# Altium PCB UltraZohm_Analog_BreakoutBoard.PcbDoc
Units mil, origin at the board's own origin, x right, y up, seen from the top; angles counter-clockwise.
Board outline 1968.5 x 3149.61 mil, 2 copper layers (Top Layer, Bottom Layer), stack 12.8 mil thick; 11 components, 51 nets, 203 pads, 14 vias.
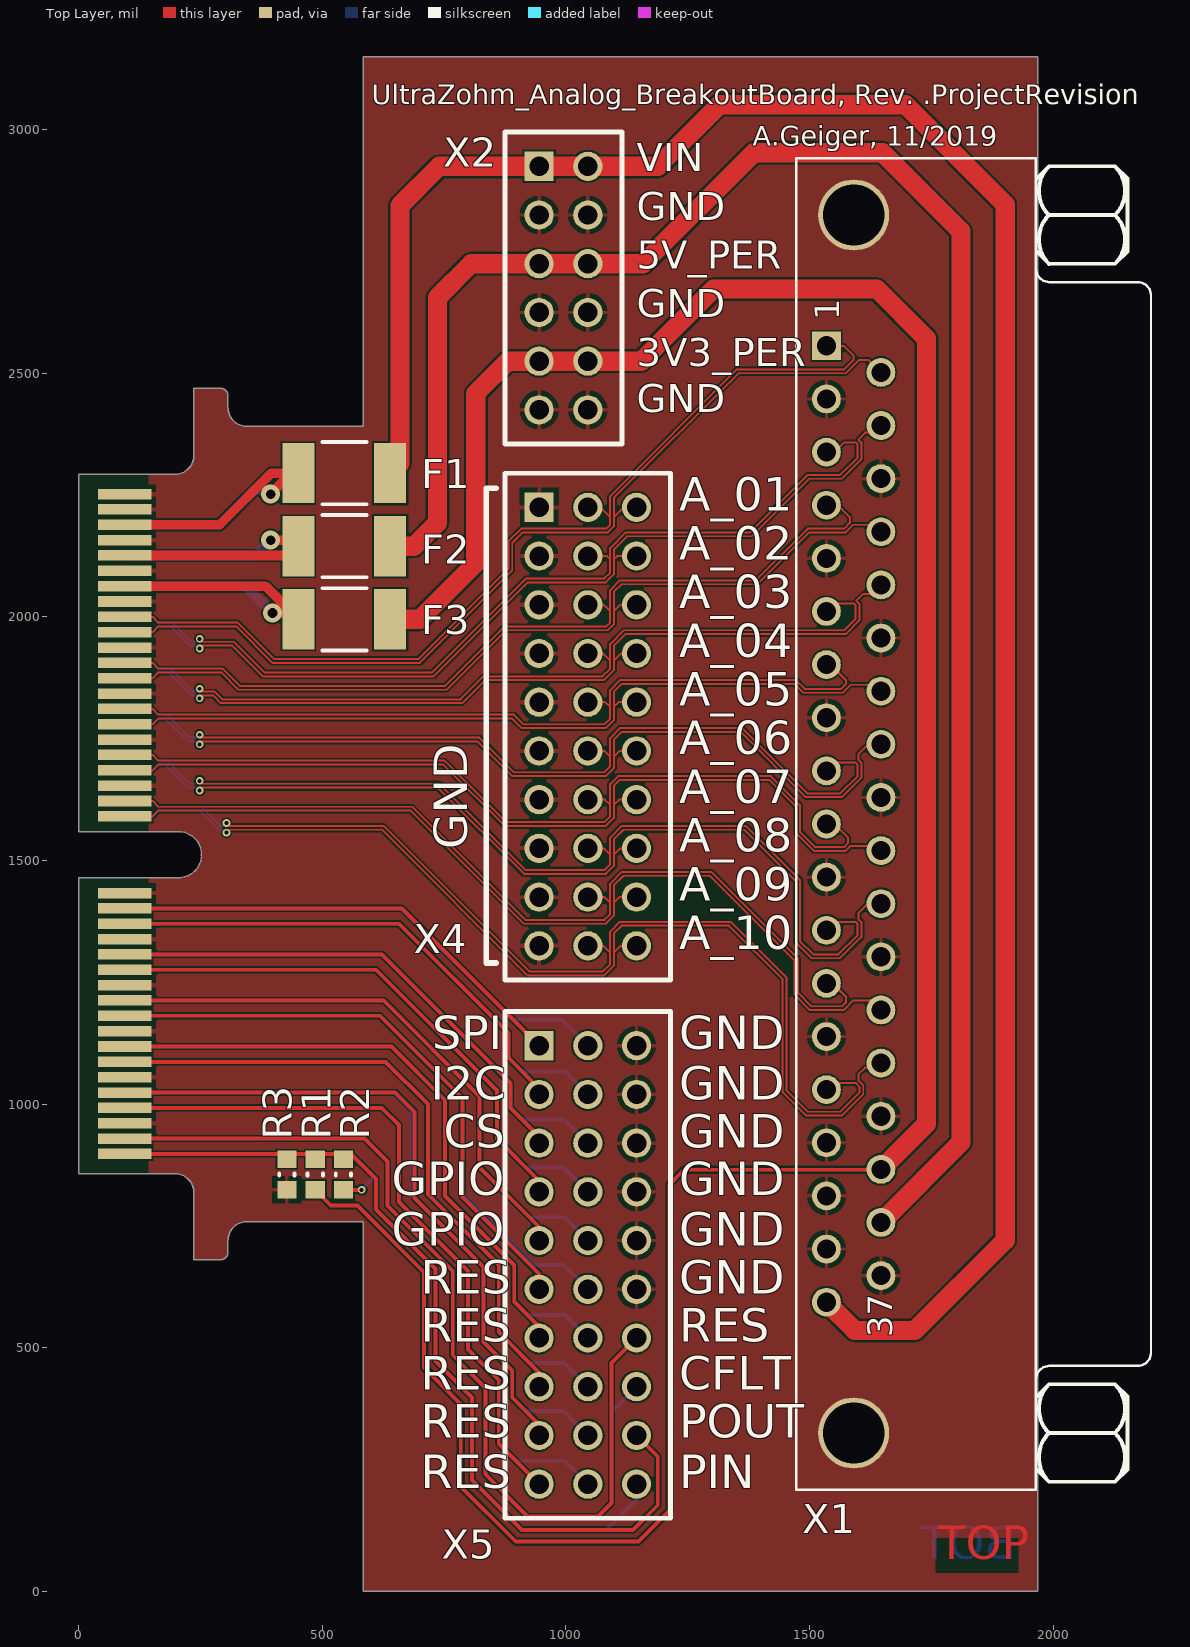
[diagram p0: Top Layer view]
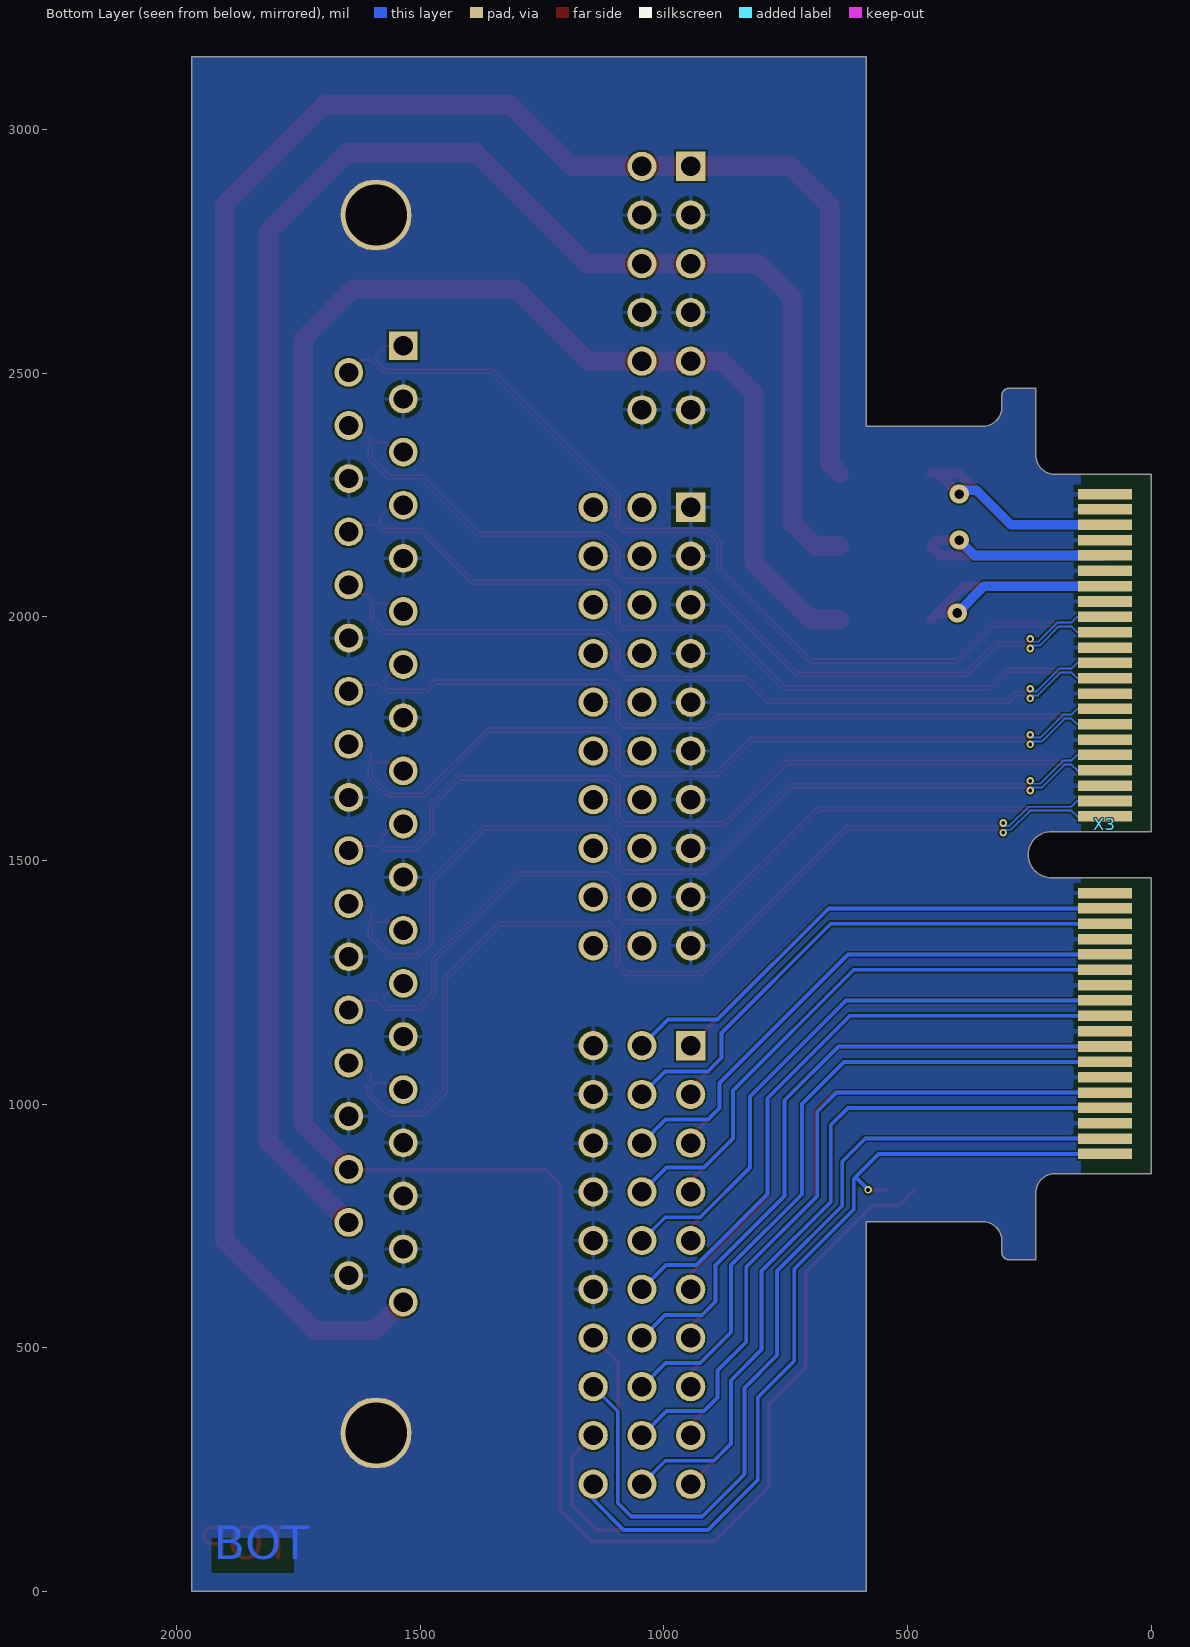
[diagram p1: Bottom Layer view, seen from below]
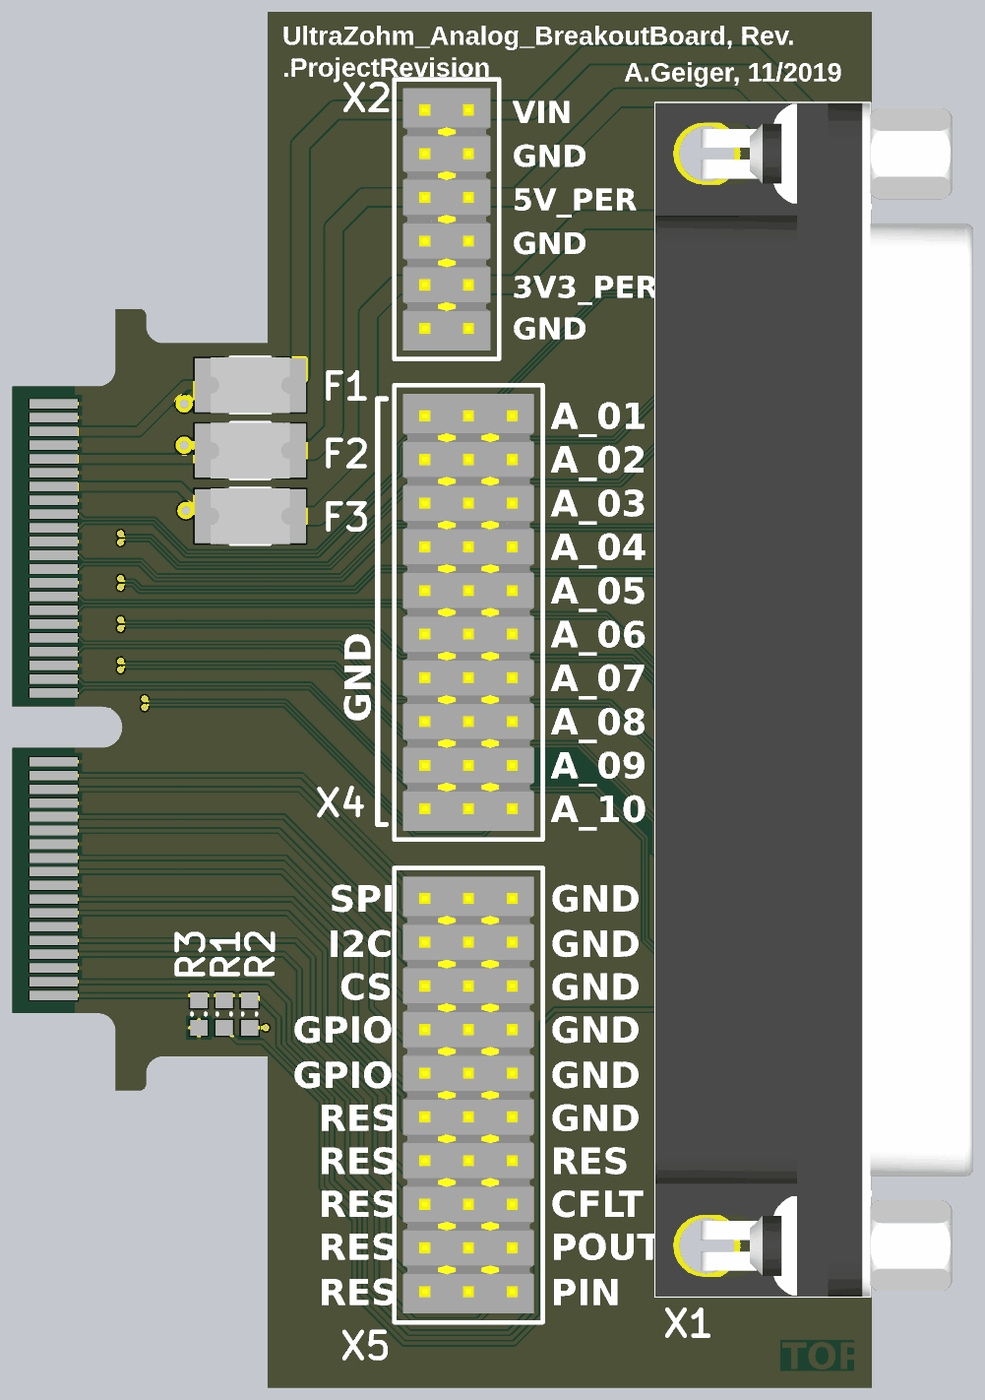
[diagram p2: 3D render of the assembled board from above, using the file's embedded part models]

## Layer stack, top to bottom
Top Solder: solder mask 0.4, Solder Resist, Dk 3.5
Top Layer: signal copper 1.4
Dielectric 1: core 10, FR-4, Dk 4.2
Bottom Layer: signal copper 1.4
Bottom Solder: solder mask 0.4, Solder Resist, Dk 3.5

## Board outline
0,857.28 196.86,857.28 cw(c196.86,817.91) 236.23,817.91 236.23,680.12 290.55,680.12 ccw(c290.55,695.87) 306.3,695.87 306.3,719.49 cw(c345.67,719.49) 345.67,758.86 584.25,758.86 584.25,0 1968.5,0 1968.5,3149.61 584.25,3149.61 584.25,2390.75 345.67,2390.75 cw(c345.67,2430.12) 306.3,2430.12 306.3,2453.74 ccw(c290.55,2453.74) 290.55,2469.49 236.23,2469.49 236.23,2331.69 cw(c196.86,2331.69) 196.86,2292.32 0,2292.32 0,1559.05 204.72,1559.05 204.72,1559.06 cw(c204.72,1511.81) 204.72,1464.57 0,1464.57

## Design rules (kind name [scope] priority, off if disabled: settings)
Clearance [All] p1: gap=3.94 ignorepadtopadclearanceinfootprint=FALSE except(0: Arc-Hole Track-Hole SMDPad-Hole THPad-Hole Via-Hole Fill-Hole Poly-Hole Region-Hole Text-Hole)
ComponentClearance [All] p1: gap=3.94 collisioncheckmode=3 verticalgap=3.94 showdistances=FALSE
DiffPairsRouting [All] p1: maxlimit=4.72 minlimit=4.72 mostfreqgap=4.72 toplayer_minwidth=3.94 toplayer_maxwidth=3.94 toplayer_prefwidth=3.94 bottomlayer_minwidth=3.94 bottomlayer_maxwidth=3.94 bottomlayer_prefwidth=3.94 maxuncoupledlength=500
Height [All] p1: minheight=0 maxheight=1968.5 prefheight=500
HoleSize [All] p1: absolutevalues=TRUE maxlimit=157.48 minlimit=1 maxpercent=80.000 minpercent=20.000
PolygonConnect PolygonConnect_Therm [HoleSize > 2.6] p1: connectstyle=Direct reliefconductorwidth=10 reliefentries=4 polygonreliefangle="90 Angle" airgapwidth=10
PolygonConnect PolygonConnect_via [InPadClass('pad') or IsVia] p2: connectstyle=Direct reliefconductorwidth=10 reliefentries=4 polygonreliefangle="90 Angle" airgapwidth=10
PolygonConnect [All] p3: connectstyle=Relief reliefconductorwidth=7.87 reliefentries=4 polygonreliefangle="90 Angle" airgapwidth=9.84
RoutingVias [All] p1: holewidth=7.87 width=15.75 viastyle="Through Hole" minholewidth=7.87 minwidth=15.75 maxholewidth=19.68 maxwidth=39.37
SolderMaskExpansion [All] p1: expansion=4
Width [All] p1: maxlimit=393.7 minlimit=3.94 preferedwidth=3.94
26 further rules are at their usual default settings.

## Classes and differential pairs
differential pair ANL_01: +ANL_01_P -ANL_01_N
differential pair ANL_02: +ANL_02_P -ANL_02_N
differential pair ANL_03: +ANL_03_P -ANL_03_N
differential pair ANL_04: +ANL_04_P -ANL_04_N
differential pair ANL_05: +ANL_05_P -ANL_05_N
differential pair ANL_06: +ANL_06_P -ANL_06_N
differential pair ANL_07: +ANL_07_P -ANL_07_N
differential pair ANL_08: +ANL_08_P -ANL_08_N
differential pair ANL_09: +ANL_09_P -ANL_09_N
differential pair ANL_10: +ANL_10_P -ANL_10_N

## Components (designator, comment, footprint, x,y, rotation, side; value= is the part's Value field where it differs from the comment)
F1 "PTC, 1.1A, 24V" 1812_PTC_Polyfuse_Littelfuse 545,2295 r0 top
F2 "PTC, 1.1A, 24V" 1812_PTC_Polyfuse_Littelfuse 545,2145 r0 top
F3 "PTC, 1.1A, 24V" 1812_PTC_Polyfuse_Littelfuse 545,1995 r0 top
R1 "dnp" R_0603_N 485.25,855.4 r90 top
R2 "0R" R_0603_N 543.36,855.4 r270 top
R3 "dnp" R_0603_N 427.14,855.4 r90 top
X1 "618037231121" 618037231121 1590.63,1574.8 r90 top
X2 "TSW-106-07-F-D" TSW-106-XX-XXX-D 994.88,2674.8 r270 top
X3 "HSEC8-140-01-XX-DV-A-BL-CARD" HSEC8-140-01-XX-DV-A-BL-CARD 0,1574.8 r90 bottom
X4 "TSW-110-07-F-T" TSW-110-XX-XXX-T 1044.88,1774.8 r270 top
X5 "TSW-110-07-F-T" TSW-110-XX-XXX-T 1044.88,669.8 r270 top

## Footprints (in the part's own frame and the unit in brackets; to place one, negate y for a bottom-side part, rotate by r counter-clockwise, add the part's x,y. Pads: shape width x height; smd on the part's side, far side on the other; paste and mask are expansions set on the pad)
1812_PTC_Polyfuse_Littelfuse [mm] "Chip Fuse, 2-Leads, Body 4.6x3.24mm"
  rect 1.68x3.14 smd: 1(-2.39,0) 2(2.39,0)
  silkscreen extent -1.15,-1.62 1.15,1.62, body extent -2.3,-1.62 2.3,1.62, height 1.15
618037231121 [mm] "37 pins, right angled, 8.08mm, with hex screw"
  rect 1.5x1.5 hole 1: 1(24.93,1.42)
  round 1.5 hole 1: 2(22.16,1.42) 3(19.39,1.42) 4(16.62,1.42) 5(13.85,1.42) 6(11.08,1.42) 7(8.31,1.42) 8(5.54,1.42) 9(2.77,1.42) 10(0,1.42) 11(-2.77,1.42) 12(-5.54,1.42) 13(-8.31,1.42) 14(-11.08,1.42) 15(-13.85,1.42) 16(-16.62,1.42) 17(-19.39,1.42) 18(-22.16,1.42) 19(-24.93,1.42) 20(23.545,-1.42) 21(20.775,-1.42) 22(18.005,-1.42) 23(15.235,-1.42) 24(12.465,-1.42) 25(9.695,-1.42) 26(6.925,-1.42) 27(4.155,-1.42) 28(1.385,-1.42) 29(-1.385,-1.42) 30(-4.155,-1.42) 31(-6.925,-1.42) 32(-9.695,-1.42) 33(-12.465,-1.42) 34(-15.235,-1.42) 35(-18.005,-1.42) 36(-20.775,-1.42) 37(-23.545,-1.42)
  round 3.7 hole 3.2: Z1(-31.75,0) Z2(31.75,0)
  silkscreen extent -34.7,-15.5 34.7,3, body extent -34.7,-15.5 34.7,3, height 12.51
HSEC8-140-01-XX-DV-A-BL-CARD [mm]
  rect 0.55x2.8 smd far side mask+0.05: 1(17.2,2.4) 3(16.4,2.4) 5(15.6,2.4) 7(14.8,2.4) 9(14,2.4) 11(13.2,2.4) 13(12.4,2.4) 15(11.6,2.4) 17(10.8,2.4) 19(10,2.4) 21(9.2,2.4) 23(8.4,2.4) 25(7.6,2.4) 27(6.8,2.4) 29(6,2.4) 31(5.2,2.4) 33(4.4,2.4) 35(3.6,2.4) 37(2.8,2.4) 39(2,2.4) 41(1.2,2.4) 43(0.4,2.4) 45(-3.6,2.4) 47(-4.4,2.4) 49(-5.2,2.4) 51(-6,2.4) 53(-6.8,2.4) 55(-7.6,2.4) 57(-8.4,2.4) 59(-9.2,2.4) 61(-10,2.4) 63(-10.8,2.4) 65(-11.6,2.4) 67(-12.4,2.4) 69(-13.2,2.4) 71(-14,2.4) 73(-14.8,2.4) 75(-15.6,2.4) 77(-16.4,2.4) 79(-17.2,2.4)
  rect 0.55x2.8 smd mask+0.05: 2(17.2,2.4) 4(16.4,2.4) 6(15.6,2.4) 8(14.8,2.4) 10(14,2.4) 12(13.2,2.4) 14(12.4,2.4) 16(11.6,2.4) 18(10.8,2.4) 20(10,2.4) 22(9.2,2.4) 24(8.4,2.4) 26(7.6,2.4) 28(6.8,2.4) 30(6,2.4) 32(5.2,2.4) 34(4.4,2.4) 36(3.6,2.4) 38(2.8,2.4) 40(2,2.4) 42(1.2,2.4) 44(0.4,2.4) 46(-3.6,2.4) 48(-4.4,2.4) 50(-5.2,2.4) 52(-6,2.4) 54(-6.8,2.4) 56(-7.6,2.4) 58(-8.4,2.4) 60(-9.2,2.4) 62(-10,2.4) 64(-10.8,2.4) 66(-11.6,2.4) 68(-12.4,2.4) 70(-13.2,2.4) 72(-14,2.4) 74(-14.8,2.4) 76(-15.6,2.4) 78(-16.4,2.4) 80(-17.2,2.4)
R_0603_N [mm] "SMD Resistor, Body 1.6x0.8mm, IPC Medium Density"
  rect 0.9x1 smd: 1(-0.8,0) 2(0.8,0)
  silkscreen extent -0.05,-0.4 0.05,0.4, body extent -0.85,-0.47 0.85,0.47, height 0.6
TSW-106-XX-XXX-D [mil] "Pinheader, 2.54mm Pitch"
  rect 60x60 hole 40 mask+3: 1(-250,-50)
  round 60 hole 40 mask+3: 2(-250,50) 3(-150,-50) 4(-150,50) 5(-50,-50) 6(-50,50) 7(50,-50) 8(50,50) 9(150,-50) 10(150,50) 11(250,-50) 12(250,50)
  silkscreen extent -320,-120 320,120, body extent -300,-100 300,100, height 330
TSW-110-XX-XXX-T [mil] "Pinheader, 2.54mm Pitch"
  rect 60x60 hole 40 mask+3: 1(-450,-100)
  round 60 hole 40 mask+3: 2(-450,0) 3(-450,100) 4(-350,-100) 5(-350,0) 6(-350,100) 7(-250,-100) 8(-250,0) 9(-250,100) 10(-150,-100) 11(-150,0) 12(-150,100) 13(-50,-100) 14(-50,0) 15(-50,100) 16(50,-100) 17(50,0) 18(50,100) 19(150,-100) 20(150,0) 21(150,100) 22(250,-100) 23(250,0) 24(250,100) 25(350,-100) 26(350,0) 27(350,100) 28(450,-100) 29(450,0) 30(450,100)
  silkscreen extent -520,-170 520,170, body extent -500,-150 500,150, height 330

## Part data
F1 F2 F3: library part Littelfuse_PTC_1812, "Resettable PTC Polyfuse SMD, 1812, automotive"
R1 R2 R3: library part R_0603, "SMD Resistor 0603"
X1: library part "WE-D-Sub Connectors 618037231121", "WR-DSUB Female Angled PCB Connector"
X2: library part TSW-106-XX-XXX-D, "Pin Header, 2.54mm"
X3: "Mating Card Layout for HSEC8-140-01-XX-DV-A-BL"
X4 X5: library part TSW-110-XX-XXX-T, "Pin Header, 2.54mm"

## Via types
v1: diameter 15.75, hole 7.87, Top Layer to Bottom Layer, 11 vias
v2: diameter 39.37, hole 19.68, Top Layer to Bottom Layer, 3 vias

## Nets (pads, with @x,y where several pads share a name; then routed paths per layer and width w, separated by ;. In a path a pad name is that pad's centre, name@x,y a point inside that pad or via, vN(x,y) a via of type N, cw(c..) or ccw(c..) an arc to the next point about the centre after c; other vN are vias at no path point)
3V3_PER: F3.1 X3.13 X3.14 | length 751
  Top Layer w19.68: X3.13 382.91,2062.99 F3.1@438.03,2007.87 ; v2(397.64,2007.87) F3.1@438.03,2007.87 ; F3.1 F3.1@438.03,2007.87
  Bottom Layer w19.68: X3.14 342.52,2062.99 v2(397.64,2007.87)
3V3_PER_FUSED: F3.2 R1.1 X1.35 X2.9 X2.10 | length 5755
  Top Layer w7.87: R1.1 517.35,791.81 571.81,791.81 708.83,654.79 708.83,459.57 783.89,384.51 783.89,214.85 896.9,101.83 1148.71,101.83 1212.6,165.72 1212.6,835.16 1242.62,865.19 1645.78,865.19 X1.35
  Top Layer w39.37: F3.2 699.72,1995 814.96,2110.24 814.96,2458.66 881.1,2524.8 X2.9 X2.10 1154.72,2524.8 1303.15,2673.23 1637.8,2673.23 1740.16,2570.87 1740.16,959.57 X1.35
5V_PER: F2.1 X3.9 X3.10 | length 738.9
  Top Layer w19.68: X3.9 431.89,2125.98 F2.1 438.43,2157.48 v2(393.7,2157.48)
  Bottom Layer w19.68: X3.10 334.65,2125.98 362.2,2125.98 v2(393.7,2157.48)
5V_PER_FUSED: F2.2 X1.36 X2.5 X2.6 | length 3946.9
  Top Layer w39.37: F2.2 688.31,2145 736.22,2192.91 736.22,2655.51 805.51,2724.8 X2.5 X2.6 1157.87,2724.8 1385.83,2952.76 1649.61,2952.76 1811.02,2791.34 1811.02,921.38 X1.36
ANL_01_N: X1.20 X3.19 X4.3 | length 1978.3
  Top Layer w3.94: X3.19 151.57,1968.5 163.39,1980.32 322.83,1980.32 397.64,1905.51 700.11,1905.51 889.76,2095.16 889.76,2151.57 911.42,2173.23 1085.94,2173.23 1098.43,2185.71 1098.43,2204.72 ; X4.3 1118.5,2224.8 1098.43,2204.72 ; X1.20 1620.75,2527.56 1601.69,2527.56 1574.13,2500 1354.33,2500 1098.43,2244.09 1098.43,2204.72
ANL_01_P: X1.1 X3.17 X4.2 | length 1979.9
  Top Layer w3.94: X3.17 151.57,2000 163.39,1988.19 326.1,1988.19 400.9,1913.39 696.85,1913.39 881.89,2098.43 881.89,2154.84 908.16,2181.1 1082.68,2181.1 1090.55,2188.98 1090.55,2204.72 ; X4.2 1070.47,2224.8 1090.55,2204.72 ; X1.1 1569.68,2556.3 1590.55,2535.43 1590.55,2527.56 1570.87,2507.87 1351.07,2507.87 1090.55,2247.36 1090.55,2204.72
ANL_02_N: X1.21 X3.20 X4.6 | length 1928.7
  Top Layer w3.94: v1(248.03,1935.04) 253.94,1940.95 314.96,1940.95 377.95,1877.95 728.35,1877.95 921.26,2070.87 1082,2070.87 1098.43,2087.29 1098.43,2118.11 ; X4.6 1105.12,2124.8 1098.43,2118.11 ; X1.21 1631.76,2377.95 1614.17,2377.95 1600.06,2363.84 1606.3,2357.59 1606.3,2323.51 1566.25,2283.46 1499.32,2283.46 1381.21,2165.35 1125.98,2165.35 1098.43,2137.8 1098.43,2118.11
  Bottom Layer w3.94: X3.20 151.57,1968.5 163.39,1980.32 188.98,1980.32 228.35,1940.95 242.13,1940.95 v1(248.03,1935.04)
ANL_02_P: X1.3 X3.18 X4.5 | length 1918
  Top Layer w3.94: v1(248.03,1954.72) 253.94,1948.82 318.22,1948.82 381.21,1885.83 725.08,1885.83 918,2078.74 1078.74,2078.74 1090.55,2090.55 1090.55,2118.11 ; X4.5 1083.86,2124.8 1090.55,2118.11 ; X1.3 1551.18,2338.19 1571.26,2358.27 1594.49,2358.27 1598.43,2354.33 1598.43,2326.77 1562.99,2291.34 1496.06,2291.34 1377.95,2173.23 1122.72,2173.23 1090.55,2141.06 1090.55,2118.11
  Bottom Layer w3.94: X3.18 151.57,2000 163.39,1988.19 192.24,1988.19 231.61,1948.82 242.13,1948.82 v1(248.03,1954.72)
ANL_03_N: X1.23 X3.25 X4.9 | length 1808.5
  Top Layer w3.94: X3.25 151.57,1874.01 163.39,1885.83 292.01,1885.83 327.45,1850.39 755.23,1850.39 877.28,1972.44 1085.94,1972.44 1098.43,1984.93 1098.43,2011.81 ; X4.9 1111.42,2024.8 1098.43,2011.81 ; X1.23 1632.16,2188.98 1589.88,2188.98 1574.13,2173.23 1499.32,2173.23 1393.03,2066.93 1114.17,2066.93 1098.43,2051.18 1098.43,2011.81
ANL_03_P: X1.4 X3.23 X4.8 | length 1806.1
  Top Layer w3.94: X3.23 151.57,1905.51 163.39,1893.7 295.28,1893.7 330.71,1858.27 751.97,1858.27 874.02,1980.32 1082.68,1980.32 1090.55,1988.19 1090.55,2011.81 ; X4.8 1077.56,2024.8 1090.55,2011.81 ; X1.4 1558.27,2229.13 1582.68,2204.72 1582.68,2192.91 1570.87,2181.1 1496.06,2181.1 1389.76,2074.8 1110.91,2074.8 1090.55,2054.44 1090.55,2011.81
ANL_04_N: X1.24 X3.26 X4.12 | length 1803.3
  Top Layer w3.94: v1(248.03,1832.68) 253.94,1838.58 275.59,1838.58 291.34,1822.83 786.73,1822.83 833.97,1870.08 1078.06,1870.08 1098.43,1890.44 1098.43,1909.45 ; X4.12 1113.78,1924.8 1098.43,1909.45 ; X1.24 1628.22,2047.24 1610.24,2047.24 1596.12,2033.13 1602.36,2026.88 1602.36,1992.8 1574.13,1964.57 1122.05,1964.57 1098.43,1940.95 1098.43,1909.45
  Bottom Layer w3.94: X3.26 151.57,1874.01 163.39,1885.83 185.04,1885.83 232.28,1838.58 242.13,1838.58 v1(248.03,1832.68)
ANL_04_P: X1.6 X3.24 X4.11 | length 1781.8
  Top Layer w3.94: v1(248.03,1852.36) 253.94,1846.46 278.85,1846.46 294.6,1830.71 783.46,1830.71 830.71,1877.95 1074.8,1877.95 1090.55,1893.7 1090.55,1909.45 ; X4.11 1075.2,1924.8 1090.55,1909.45 ; X1.6 1551.26,2027.56 1590.55,2027.56 1594.49,2023.62 1594.49,1996.06 1570.87,1972.44 1118.79,1972.44 1090.55,1944.21 1090.55,1909.45
  Bottom Layer w3.94: X3.24 151.57,1905.51 163.39,1893.7 188.3,1893.7 235.54,1846.46 242.13,1846.46 v1(248.03,1852.36)
ANL_05_N: X1.26 X3.31 X4.15 | length 1707.1
  Top Layer w3.94: X3.31 151.57,1779.53 163.39,1791.34 889.76,1791.34 909.45,1771.65 1082,1771.65 1098.43,1788.08 1098.43,1814.96 ; X4.15 1108.27,1824.8 1098.43,1814.96 ; X1.26 1633.4,1860.57 1584.31,1860.57 1567.88,1844.15 1486.56,1844.15 1468.5,1862.2 1114.17,1862.2 1098.43,1846.46 1098.43,1814.96
ANL_05_P: X1.7 X3.29 X4.14 | length 1687.7
  Top Layer w3.94: X3.29 151.57,1811.02 163.39,1799.21 893.03,1799.21 912.71,1779.53 1078.74,1779.53 1090.55,1791.34 1090.55,1814.96 ; X4.14 1080.71,1824.8 1090.55,1814.96 ; X1.7 1542.91,1901.97 1574.8,1870.08 1574.8,1862.2 1564.62,1852.02 1489.82,1852.02 1471.77,1870.08 1110.91,1870.08 1090.55,1849.72 1090.55,1814.96
ANL_06_N: X1.27 X3.32 X4.18 | length 1871.4
  Top Layer w3.94: v1(248.03,1738.19) 253.94,1744.09 818.9,1744.09 889.76,1673.23 1082,1673.23 1098.43,1689.65 1098.43,1712.6 ; X4.18 1110.63,1724.8 1098.43,1712.6 ; X1.27 1620.27,1738.38 1600.06,1718.17 1600.06,1706.36 1606.3,1700.11 1606.3,1669.97 1566.25,1629.92 1492.13,1629.92 1358.27,1763.78 1114.17,1763.78 1098.43,1748.03 1098.43,1712.6
  Bottom Layer w3.94: X3.32 151.57,1779.53 163.39,1791.34 177.17,1791.34 224.41,1744.09 242.13,1744.09 v1(248.03,1738.19)
ANL_06_P: X1.9 X3.30 X4.17 | length 1851.2
  Top Layer w3.94: v1(248.03,1757.87) 253.94,1751.97 822.16,1751.97 893.03,1681.1 1078.74,1681.1 1090.55,1692.91 1090.55,1712.6 ; X4.17 1078.35,1724.8 1090.55,1712.6 ; X1.9 1551.65,1700.79 1594.49,1700.79 1598.43,1696.85 1598.43,1673.23 1562.99,1637.8 1495.39,1637.8 1361.53,1771.65 1110.91,1771.65 1090.55,1751.29 1090.55,1712.6
  Bottom Layer w3.94: X3.30 151.57,1811.02 163.39,1799.21 180.43,1799.21 227.67,1751.97 242.13,1751.97 v1(248.03,1757.87)
ANL_07_N: X1.29 X3.37 X4.21 | length 1838.4
  Top Layer w3.94: X3.37 151.57,1685.04 163.39,1696.85 748.03,1696.85 874.02,1570.87 1082,1570.87 1098.43,1587.29 1098.43,1614.17 ; X4.21 1109.06,1624.8 1098.43,1614.17 ; X1.29 1636.94,1529.87 1584.31,1529.87 1574.13,1519.69 1508.55,1519.69 1472.44,1555.79 1472.44,1610.24 1417.32,1665.35 1110.24,1665.35 1098.43,1653.54 1098.43,1614.17
ANL_07_P: X1.10 X3.35 X4.20 | length 1832.1
  Top Layer w3.94: X3.35 151.57,1716.53 163.39,1704.72 751.29,1704.72 877.28,1578.74 1078.74,1578.74 1090.55,1590.55 1090.55,1614.17 ; X4.20 1079.92,1624.8 1090.55,1614.17 ; X1.10 1551.18,1574.8 1578.74,1547.24 1578.74,1535.43 1570.87,1527.56 1511.81,1527.56 1480.32,1559.06 1480.32,1613.5 1420.58,1673.23 1106.97,1673.23 1090.55,1656.8 1090.55,1614.17
ANL_08_N: X1.30 X3.38 X4.24 | length 2042.1
  Top Layer w3.94: v1(248.03,1643.7) 253.94,1649.61 736.9,1649.61 914.06,1472.44 1082,1472.44 1098.43,1488.86 1098.43,1511.81 ; X4.24 1111.42,1524.8 1098.43,1511.81 ; X1.30 1619.88,1411.22 1600.06,1391.39 1600.06,1379.58 1606.3,1373.34 1606.3,1343.2 1562.32,1299.21 1504.61,1299.21 1472.44,1331.38 1472.44,1456.69 1366.14,1562.99 1118.11,1562.99 1098.43,1543.31 1098.43,1511.81
  Bottom Layer w3.94: X3.38 151.57,1685.04 163.39,1696.85 177.17,1696.85 224.41,1649.61 242.13,1649.61 v1(248.03,1643.7)
ANL_08_P: X1.12 X3.36 X4.23 | length 2022.2
  Top Layer w3.94: v1(248.03,1663.39) 253.94,1657.48 740.16,1657.48 917.32,1480.32 1078.74,1480.32 1090.55,1492.13 1090.55,1511.81 ; X4.23 1077.56,1524.8 1090.55,1511.81 ; X1.12 1552.05,1374.02 1594.49,1374.02 1598.43,1370.08 1598.43,1346.46 1559.05,1307.09 1507.87,1307.09 1480.32,1334.65 1480.32,1459.95 1369.4,1570.87 1114.85,1570.87 1090.55,1546.57 1090.55,1511.81
  Bottom Layer w3.94: X3.36 151.57,1716.53 163.39,1704.72 180.43,1704.72 227.67,1657.48 242.13,1657.48 v1(248.03,1663.39)
ANL_09_N: X1.32 X3.43 X4.27 | length 1953.1
  Top Layer w3.94: X3.43 151.57,1590.55 163.39,1602.36 681.1,1602.36 913.39,1370.08 1082,1370.08 1098.43,1386.5 1098.43,1413.39 ; X4.27 1109.84,1424.8 1098.43,1413.39 ; X1.32 1627.05,1212.6 1589.88,1212.6 1570.19,1192.91 1500.68,1192.91 1468.5,1225.08 1468.5,1295.28 1295.28,1468.5 1118.11,1468.5 1098.43,1448.82 1098.43,1413.39
ANL_09_P: X1.13 X3.41 X4.26 | length 1930.8
  Top Layer w3.94: X3.41 151.57,1622.05 163.39,1610.24 684.36,1610.24 916.65,1377.95 1078.74,1377.95 1090.55,1389.76 1090.55,1413.39 ; X4.26 1079.13,1424.8 1090.55,1413.39 ; X1.13 1547.63,1247.64 1574.8,1220.47 1574.8,1208.66 1566.93,1200.79 1503.94,1200.79 1476.38,1228.35 1476.38,1298.54 1298.54,1476.38 1114.85,1476.38 1090.55,1452.08 1090.55,1413.39
ANL_10_N: X1.33 X3.44 X4.30 | length 2216.3
  Top Layer w3.94: v1(303.15,1557.09) 309.06,1562.99 622.72,1562.99 921.94,1263.78 1078.06,1263.78 1098.43,1284.14 1098.43,1311.02 ; X4.30 1112.2,1324.8 1098.43,1311.02 ; X1.33 1637.28,1074.8 1614.17,1074.8 1600.06,1060.69 1600.06,1048.87 1610.24,1038.69 1610.24,1020.36 1566.25,976.38 1492.8,976.38 1444.88,1024.3 1444.88,1255.91 1334.65,1366.14 1114.17,1366.14 1098.43,1350.39 1098.43,1311.02
  Bottom Layer w3.94: X3.44 151.57,1590.55 163.39,1602.36 248.03,1602.36 287.4,1562.99 299.21,1562.99 303.15,1559.06 v1(303.15,1557.09)
ANL_10_P: X1.15 X3.42 X4.29 | length 2193.5
  Top Layer w3.94: v1(303.15,1576.77) 309.06,1570.87 625.98,1570.87 925.2,1271.65 1074.8,1271.65 1090.55,1287.4 1090.55,1311.02 ; X4.29 1076.77,1324.8 1090.55,1311.02 ; X1.15 1548.5,1043.31 1594.49,1043.31 1602.36,1035.43 1602.36,1023.62 1562.99,984.25 1496.06,984.25 1452.76,1027.56 1452.76,1259.17 1337.91,1374.02 1110.91,1374.02 1090.55,1353.66 1090.55,1311.02
  Bottom Layer w3.94: X3.42 151.57,1622.05 163.39,1610.24 251.29,1610.24 290.66,1570.87 299.21,1570.87 303.15,1574.8 v1(303.15,1576.77)
ANL_RES_01: X3.60 X5.14 | length 1239.8
  Bottom Layer w7.87: X3.60 625.98,1212.6 822.83,1015.75 822.83,870.08 925.2,767.72 996.97,767.72 X5.14
ANL_RES_02: X3.61 X5.16 | length 1220.3
  Top Layer w7.87: X3.61 618.11,1181.1 787.4,1011.81 787.4,809.21 944.88,651.73 X5.16
ANL_RES_03: X3.62 X5.17 | length 1298.1
  Bottom Layer w7.87: X3.62 618.11,1181.1 787.4,1011.81 787.4,815.15 933.26,669.29 995.39,669.29 X5.17
ANL_RES_04: X3.65 X5.19 | length 1271.1
  Top Layer w7.87: X3.65 641.73,1118.11 751.97,1007.87 751.97,811.02 893.7,669.29 893.7,594.49 944.88,543.31 X5.19
ANL_RES_05: X3.66 X5.20 | length 1357.4
  Bottom Layer w7.87: X3.66 641.73,1118.11 751.97,1007.87 751.97,811.02 893.7,669.29 893.7,594.49 921.26,566.93 997.76,566.93 X5.20
ANL_RES_06: X3.67 X5.22 | length 1332.7
  Top Layer w7.87: X3.67 629.92,1086.61 716.54,1000 716.54,814.96 862.2,669.29 862.2,531.5 944.88,448.82 X5.22
ANL_RES_07: X3.68 X5.23 | length 1415.7
  Bottom Layer w7.87: X3.68 629.92,1086.61 716.54,1000 716.54,814.96 862.2,669.29 862.2,531.5 925.2,468.5 996.18,468.5 X5.23
ANL_RES_08: X3.71 X5.25 | length 1381.2
  Top Layer w7.87: X3.71 649.61,1023.62 688.98,984.25 688.98,807.09 830.71,665.35 830.71,511.81 889.76,452.76 889.76,397.64 944.88,342.52 X5.25
ANL_RES_09: X3.72 X5.26 | length 1465.6
  Bottom Layer w7.87: X3.72 645.67,1023.62 685.04,984.25 685.04,811.02 830.71,665.35 830.71,511.81 889.76,452.76 889.76,397.64 917.32,370.08 994.61,370.08 X5.26
ANL_RES_10: X3.73 X5.28 | length 1433.6
  Top Layer w7.87: X3.73 622.05,992.13 657.48,956.69 657.48,799.21 799.21,657.48 799.21,496.06 862.2,433.07 862.2,302.48 X5.28
ANL_RES_11: X3.74 X5.29 | length 1533.2
  Bottom Layer w7.87: X3.74 622.05,992.13 657.48,956.69 657.48,799.21 799.21,657.48 799.21,496.06 862.2,433.07 862.2,303.15 897.64,267.72 996.97,267.72 X5.29
ANL_RES_12: X3.77 X5.21 | length 1950
  Top Layer w7.87: X3.77 586.61,929.13 633.86,881.89 633.86,791.34 767.72,657.48 767.72,484.25 834.65,417.32 834.65,240.16 921.26,153.54 1066.02,153.54 1093.58,181.1 1093.58,468.5 X5.21
COLLECTIVE_FLT: X3.78 X5.24 | length 1850.6
  Bottom Layer w7.87: X3.78 586.61,929.13 633.86,881.89 633.86,791.34 767.72,657.48 767.72,484.25 834.65,417.32 834.65,240.16 921.26,153.54 1066.93,153.54 1094.49,181.1 1094.49,369.41 X5.24
CS_FASTADC: X3.54 X5.8 | length 1140.8
  Bottom Layer w7.87: X3.54 622.05,1307.09 885.83,1043.31 885.83,992.13 909.45,968.5 996.18,968.5 X5.8
GND: R3.1 X1.2 X1.5 X1.8 X1.11 X1.14 X1.16 X1.17 X1.18 X1.22 X1.25 X1.28 X1.31 X1.34 X1.37 X1.Z1 X1.Z2 X2.3 X2.4 X2.7 X2.8 X2.11 X2.12 X3.1 X3.2 X3.3 X3.4 X3.7 X3.8 X3.11 X3.12 X3.15 X3.16 X3.21 X3.22 X3.27 X3.28 X3.33 X3.34 X3.39 X3.40 X3.45 X3.46 X3.51 X3.52 X3.57 X3.58 X3.63 X3.64 X3.69 X3.70 X3.75 X3.76 X4.1 X4.4 X4.7 X4.10 X4.13 X4.16 X4.19 X4.22 X4.25 X4.28 X5.3 X5.6 X5.9 X5.12 X5.15 X5.18
I2C_SHARED_SCL: X3.49 X5.4 | length 1032.3
  Top Layer w7.87: X3.49 657.48,1370.08 881.89,1145.67 881.89,1094.92 944.88,1031.93 X5.4
I2C_SHARED_SDA: X3.50 X5.5 | length 1125.5
  Bottom Layer w7.87: X3.50 657.48,1370.08 881.89,1145.67 881.89,1094.92 909.45,1067.36 909.45,1066.93 997.76,1066.93 X5.5
PILOT_IN: R2.2 X3.80 X5.30 | length 1749.7
  Top Layer w7.87: R2.2 v1(580.63,823.91)
  Bottom Layer w7.87: X3.80 559.06,897.64 606.3,850.39 ; v1(580.63,823.91) 579.81,823.91 606.3,850.39 ; X5.30 1144.88,188.19 1082.68,125.98 909.45,125.98 807.09,228.35 807.09,397.64 732.28,472.44 732.28,661.42 610.24,783.46 610.24,846.46 606.3,850.39
PILOT_OUT: R1.2 R2.1 R3.2 X3.79 X5.27 | length 1842.5
  Top Layer w7.87: X3.79 559.06,897.64 610.24,846.46 610.24,783.46 732.28,661.42 732.28,472.44 807.09,397.64 807.09,228.35 909.45,125.98 1137.8,125.98 1188.44,176.63 1188.44,276.25 X5.27
PL_ANL_GPIO_01: X3.55 X5.10 | length 1110.2
  Top Layer w7.87: X3.55 610.24,1275.59 858.27,1027.56 858.27,929.13 944.88,842.52 X5.10
PS_ANL_GPIO_01: X3.56 X5.11 | length 1196.8
  Bottom Layer w7.87: X3.56 610.24,1275.59 858.27,1027.56 858.27,929.13 917.32,870.08 994.61,870.08 X5.11
PS_ANL_GPIO_02: X3.59 X5.13 | length 1156.4
  Top Layer w7.87: X3.59 625.98,1212.6 822.83,1015.75 822.83,870.08 944.88,748.03 X5.13
SPI_SHARED_CLK: X3.48 X5.2 | length 1067.1
  Bottom Layer w7.87: X3.48 661.42,1401.57 889.76,1173.23 991.46,1173.23 X5.2
SPI_SHARED_CS: X3.53 X5.7 | length 1048.6
  Top Layer w7.87: X3.53 622.05,1307.09 885.83,1043.31 885.83,992.13 944.88,933.07 X5.7
SPI_SHARED_MOSI: X3.47 X5.1 | length 967.1
  Top Layer w7.87: X3.47 663.11,1401.57 X5.1
VIN: F1.1 X3.5 X3.6 | length 793
  Top Layer w19.68: X3.5 289.37,2188.98 395.39,2295 F1.1@436.73,2295 ; v2(393.7,2251.97) F1.1@436.73,2295 ; F1.1 F1.1@436.73,2295
  Bottom Layer w19.68: X3.6 287.4,2188.98 358.27,2259.84 385.83,2259.84 v2(393.7,2251.97)
VIN_FUSED: F1.2 X1.19 X2.1 X2.2 | length 4563.9
  Top Layer w39.37: F1.2 659.45,2315.35 659.45,2844.49 739.76,2924.8 X2.1 X2.2 1188.58,2924.8 1314.96,3051.18 1696.85,3051.18 1901.57,2846.46 1901.57,720.47 1716.54,535.43 1592.61,535.43 X1.19

## Polygon pours and split planes (outlines as drawn)
GND on Bottom Layer "GND_Bot_Plane" (solid, remove dead copper, pour order 3): 144.12,857.28 196.86,857.28 cw(c196.86,817.91) 236.23,817.91 236.23,680.12 290.55,680.12 ccw(c290.55,695.87) 306.3,695.87 306.3,719.49 cw(c345.67,719.49) 345.67,758.86 584.25,758.86 584.25,0 1968.5,0 1968.5,3149.61 584.25,3149.61 584.25,2390.75 345.67,2390.75 cw(c345.67,2430.12) 306.3,2430.12 306.3,2453.74 ccw(c290.55,2453.74) 290.55,2469.49 236.23,2469.49 236.23,2331.69 cw(c196.86,2331.69) 196.86,2292.32 144.12,2292.32 144.12,1559.05 204.72,1559.05 cw(c204.72,1511.81) 204.72,1464.57 144.12,1464.57
GND on Top Layer "GND_Top_Plane" (solid, remove dead copper, pour order 2): 143.23,857.28 196.86,857.28 cw(c196.86,817.91) 236.23,817.91 236.23,680.12 290.55,680.12 ccw(c290.55,695.86) 306.3,695.87 306.3,719.49 cw(c345.67,719.49) 345.67,758.86 584.25,758.86 584.25,0 1968.5,0 1968.5,3149.61 584.25,3149.61 584.25,2390.75 345.67,2390.75 cw(c345.67,2430.12) 306.3,2430.12 306.3,2453.74 ccw(c290.55,2453.74) 290.55,2469.49 236.23,2469.49 236.23,2331.69 cw(c196.86,2331.69) 196.86,2292.32 143.23,2292.32 143.23,1559.05 204.72,1559.05 cw(c204.72,1511.81) 204.72,1464.57 143.23,1464.57

## Other copper
Top Layer:
  text "TOP" at 1762.81,43.12 h118.11
Bottom Layer:
  text "BOT" at 1924.08,43.04 h118.11

## Silkscreen, mask and mechanical layers (free items; w line width, h text height)
Top Overlay:
  lines w11.81: 856.3,1289.37 836.61,1289.37 836.61,2263.78 856.3,2263.78
  text "UltraZohm_Analog_BreakoutBoard, Rev. .ProjectRevision" at 601,3038.56 h68.9
  text "A.Geiger, 11/2019" at 1383,2954 h68.9
  text "VIN" at 1145.14,2895 h98.43
  text "GND" at 1145.23,2795 h98.43
  text "5V_PER" at 1145.23,2695 h98.43
  text "GND" at 1145.23,2595 h98.43
  text "3V3_PER" at 1145.23,2495 h98.43
  text "GND" at 1145.23,2400 h98.43
  text "A_01" at 1232.81,2195 h118.11
  text "A_02" at 1232.81,2095 h118.11
  text "A_03" at 1232.81,1995 h118.11
  text "A_04" at 1232.81,1895 h118.11
  text "A_05" at 1232.81,1795 h118.11
  text "A_06" at 1232.81,1695 h118.11
  text "A_07" at 1232.81,1595 h118.11
  text "GND" at 820.35,1523.46 h118.11 r90
  text "A_08" at 1232.81,1495 h118.11
  text "A_09" at 1232.81,1395 h118.11
  text "A_10" at 1232.81,1295 h118.11
  text "SPI" at 725.98,1090 h118.11
  text "GND" at 1232.81,1090 h118.11
  text "I2C" at 722.16,986.57 h118.11
  text "GND" at 1232.81,986.57 h118.11
  text "CS" at 749.05,888.15 h118.11
  text "GND" at 1232.81,888.15 h118.11
  text "GPIO" at 642.26,789.72 h118.11
  text "GND" at 1232.81,789.72 h118.11
  text "GPIO" at 642.26,686.3 h118.11
  text "GND" at 1232.81,686.3 h118.11
  text "RES" at 701.5,587.87 h118.11
  text "GND" at 1232.81,587.87 h118.11
  text "RES" at 701.5,489.45 h118.11
  text "RES" at 1232.81,489.45 h118.11
  text "RES" at 701.5,391.02 h118.11
  text "CFLT" at 1232.81,391.02 h118.11
  text "RES" at 701.5,292.6 h118.11
  text "POUT" at 1232.81,292.6 h118.11
  text "RES" at 701.5,189.17 h118.11
  text "PIN" at 1232.81,189.17 h118.11
Mechanical 1:
  lines w7.87: 584.25,758.86 584.25,0 1968.5,0 1968.5,3149.61 584.25,3149.61 584.25,2390.75

## Text inside footprints (layer, text, board x,y; h text height)
X1: Top Overlay "1" at 1561.1,2608.27 h50 r90; Top Overlay "37" at 1669.37,521.65 h50 r90